# Altium PCB PCB4.PcbDoc
Units mil, origin at the board's own origin, x right, y up, seen from the top; angles counter-clockwise.
Board outline 2745 x 2970 mil, 4 copper layers (Top Layer, Layer 1, Layer 2, Bottom Layer), stack 23.756 mil thick; 50 components, 55 nets, 201 pads, 19 vias.
Unrouted connection lines stored in the file: 120.
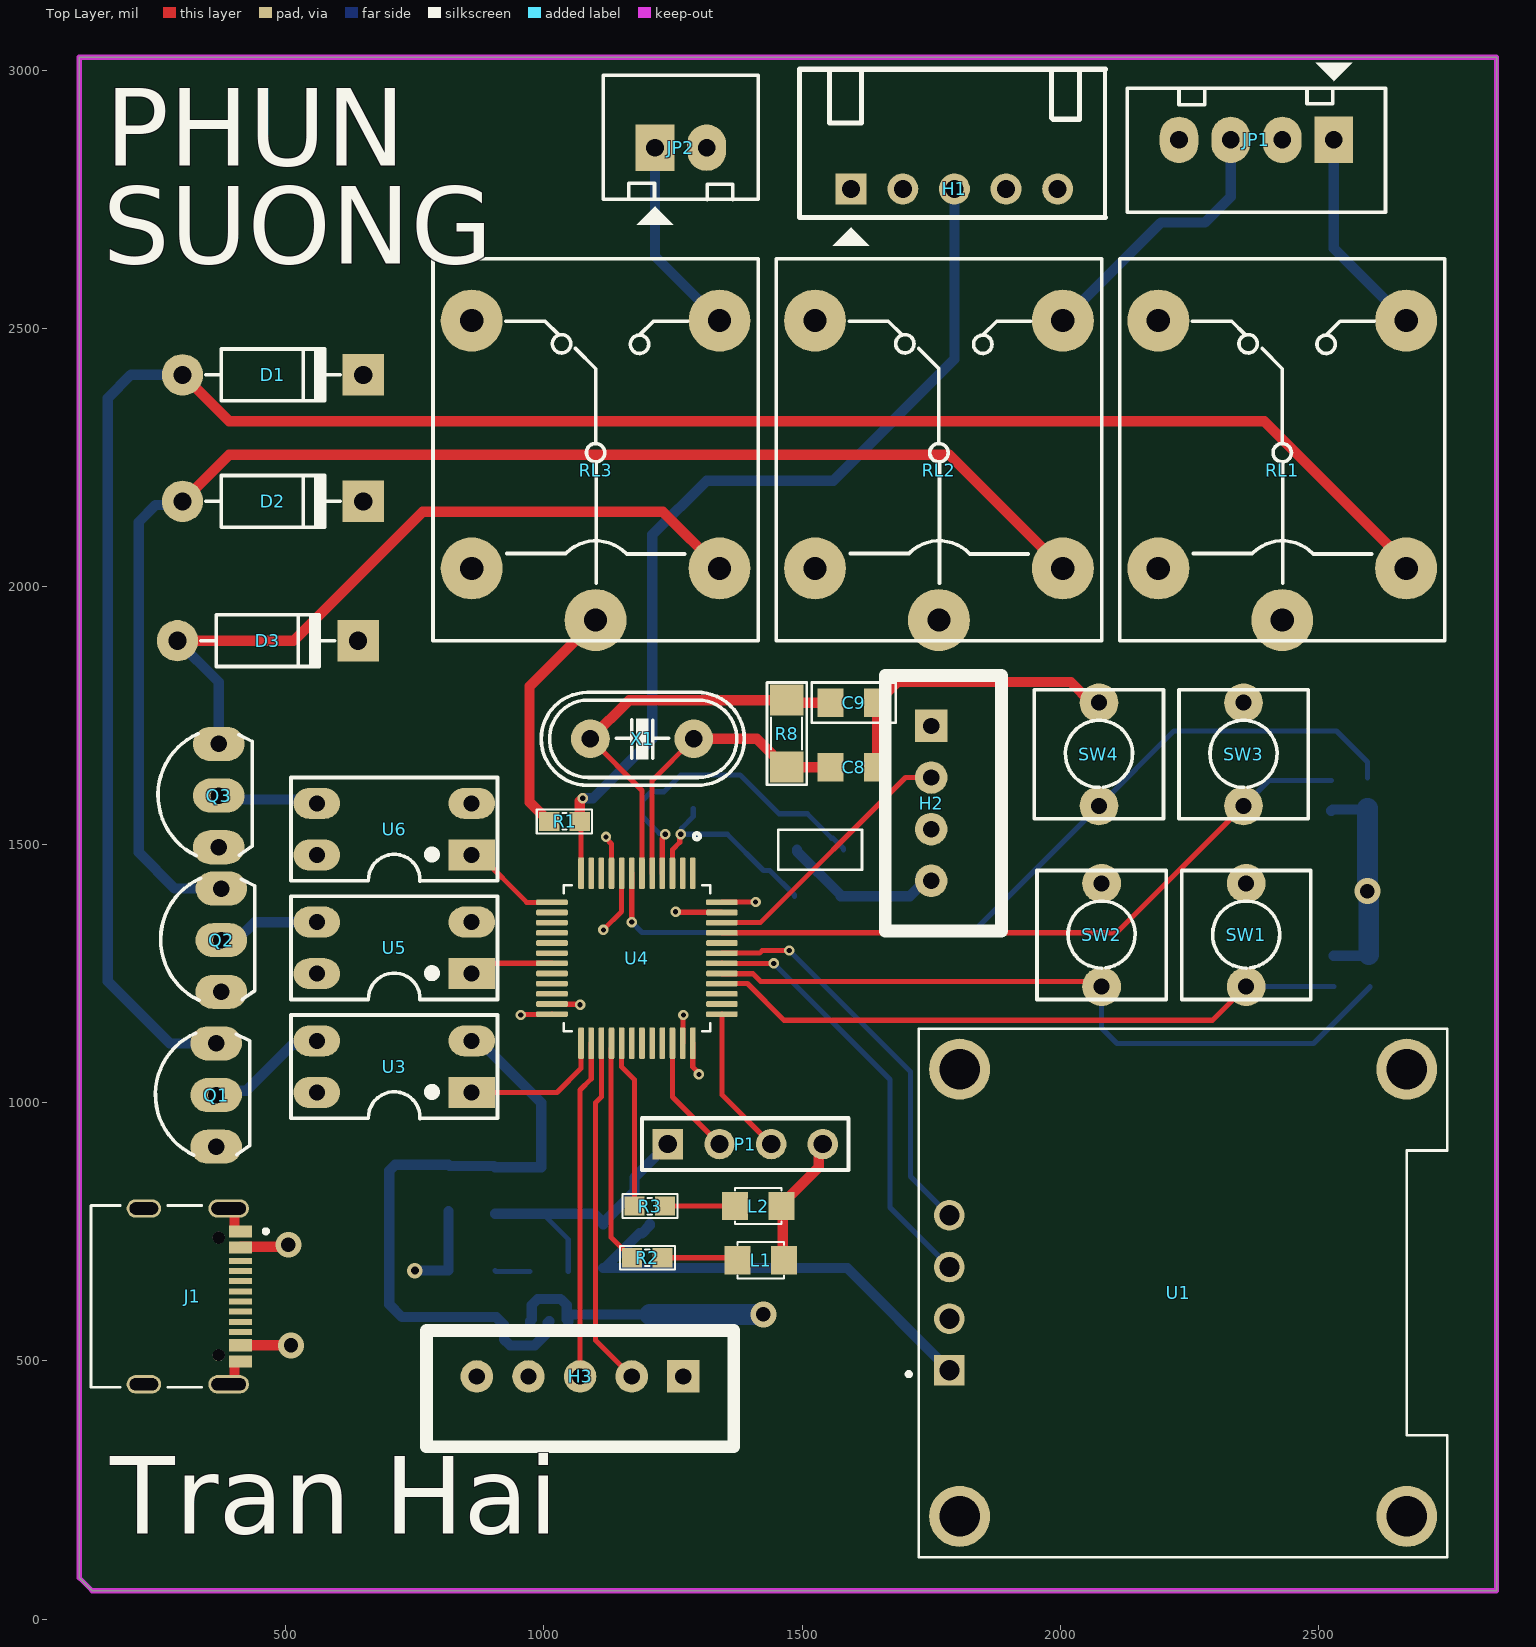
[diagram p0: Top Layer view]
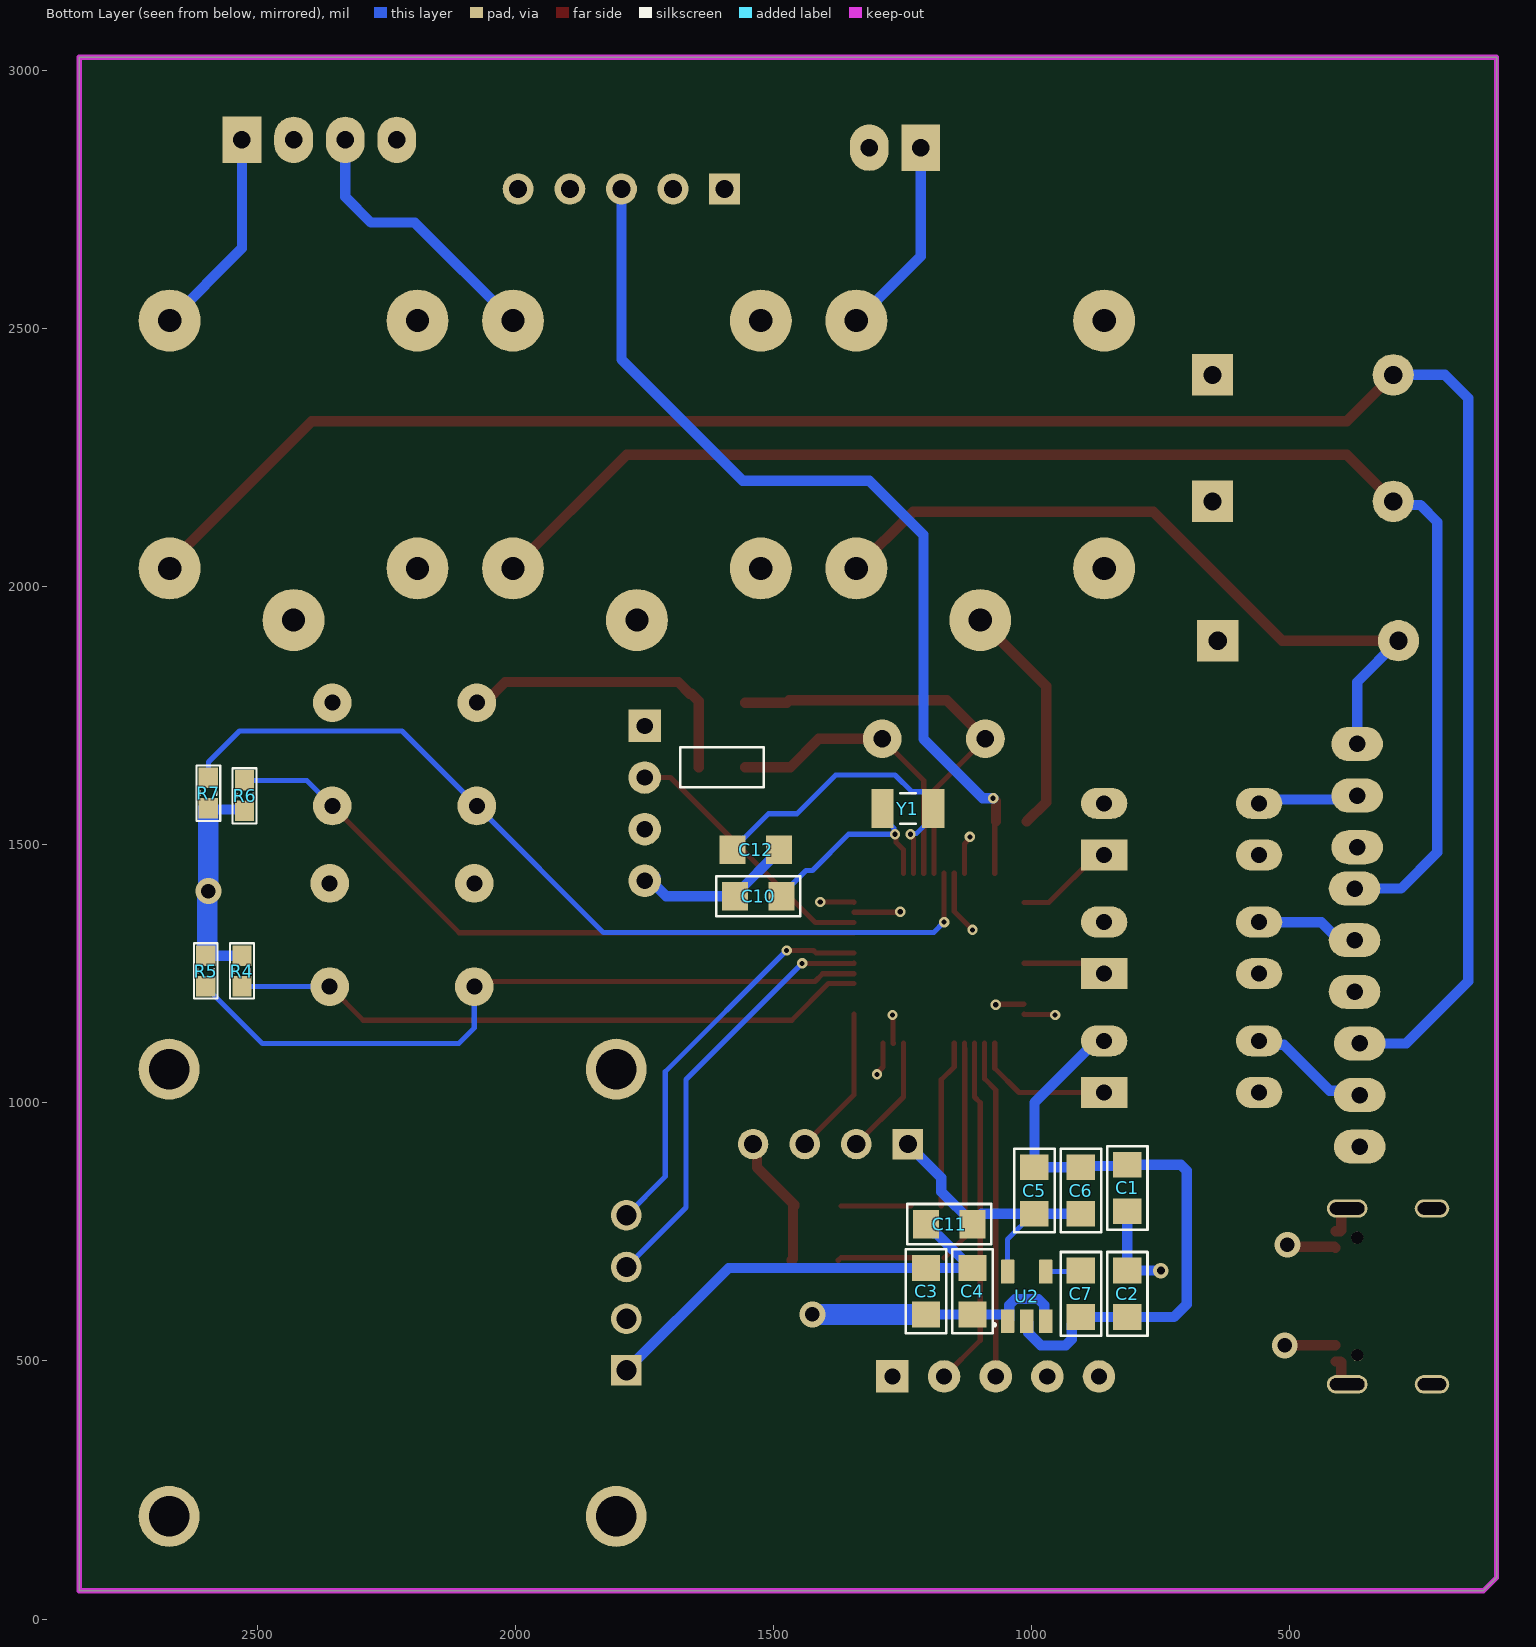
[diagram p1: Bottom Layer view, seen from below]
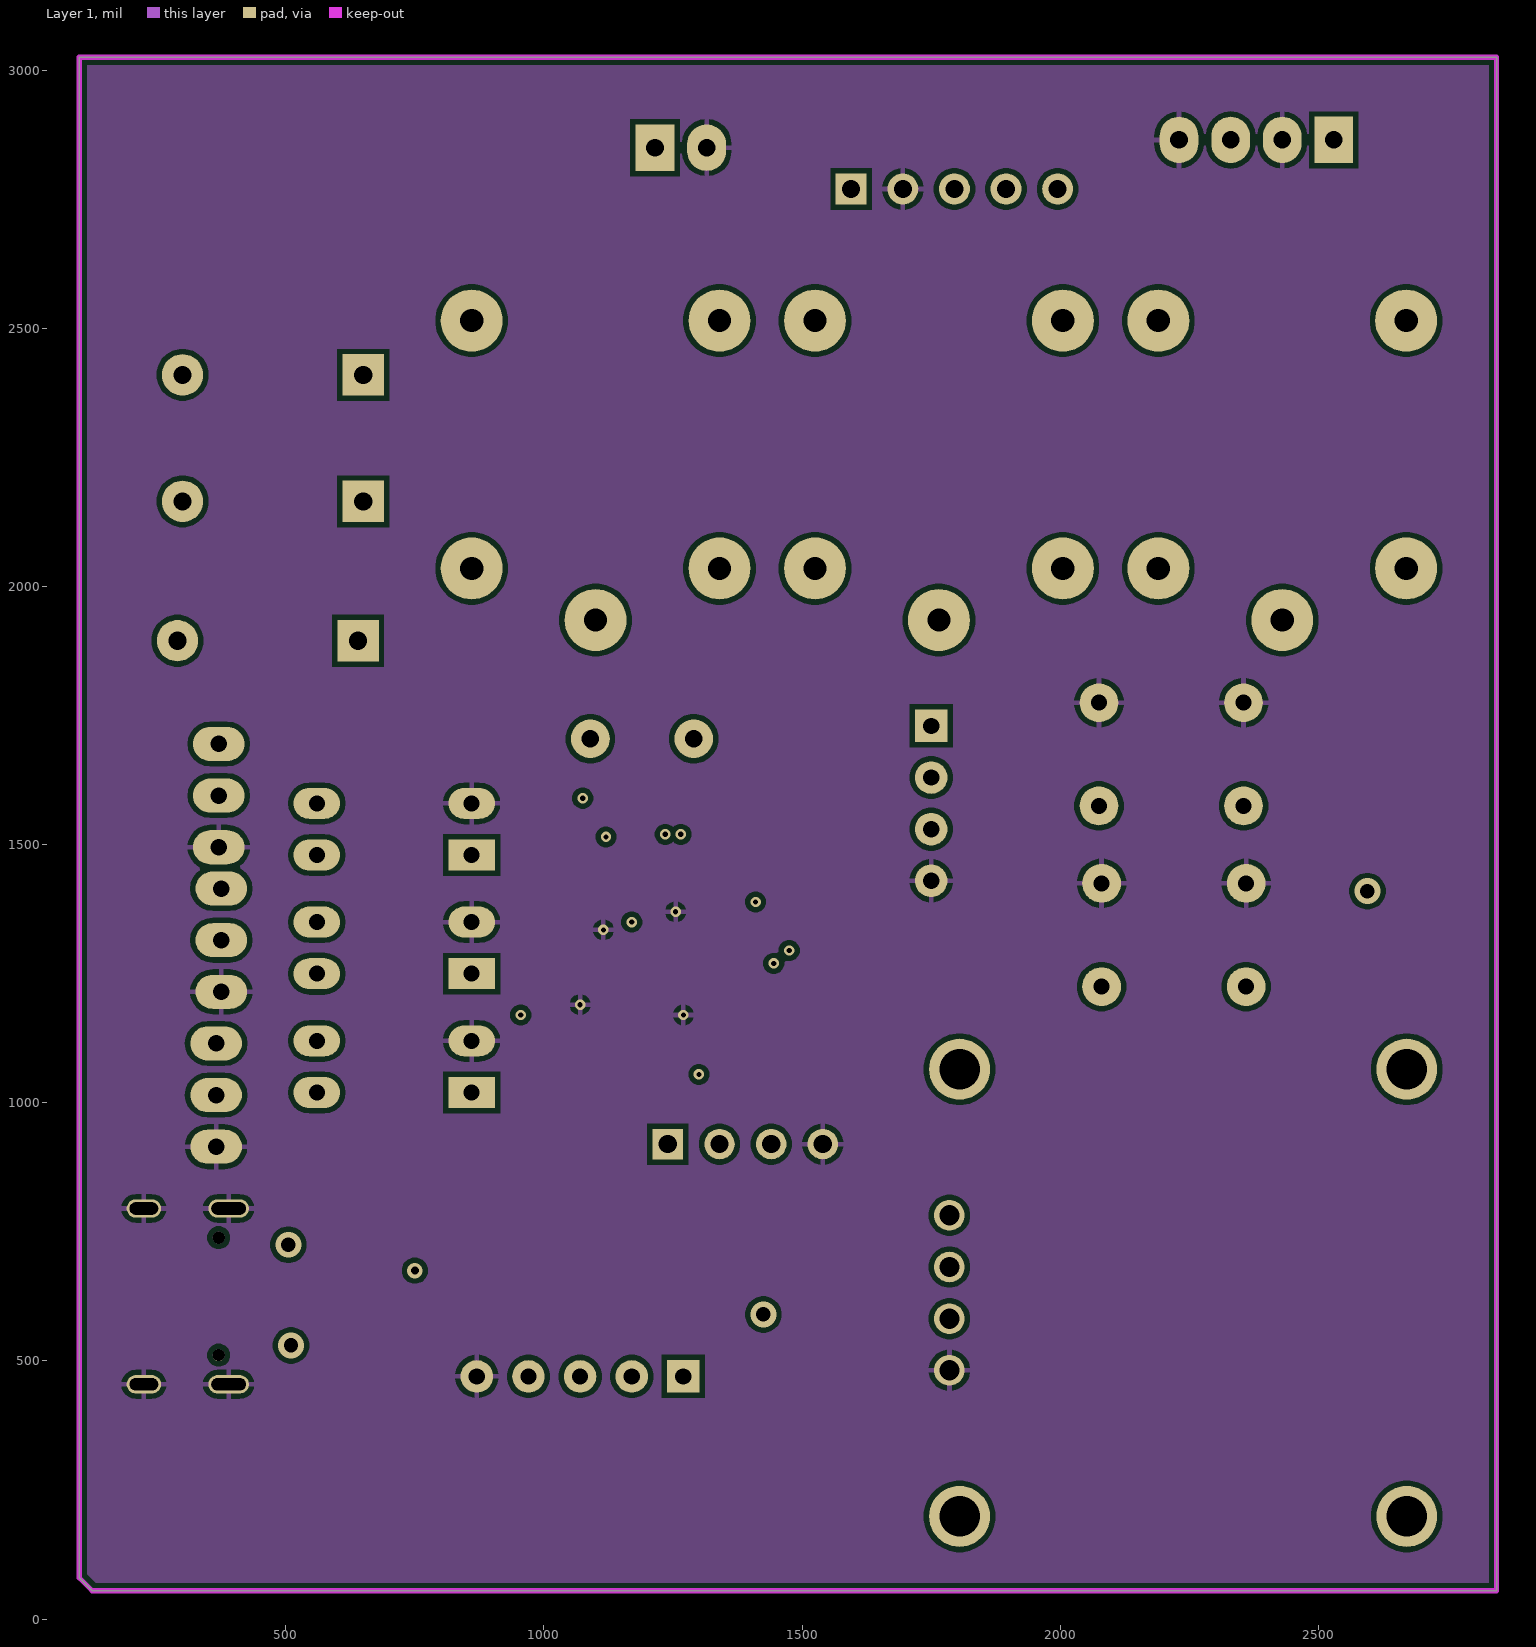
[diagram p2: Layer 1]
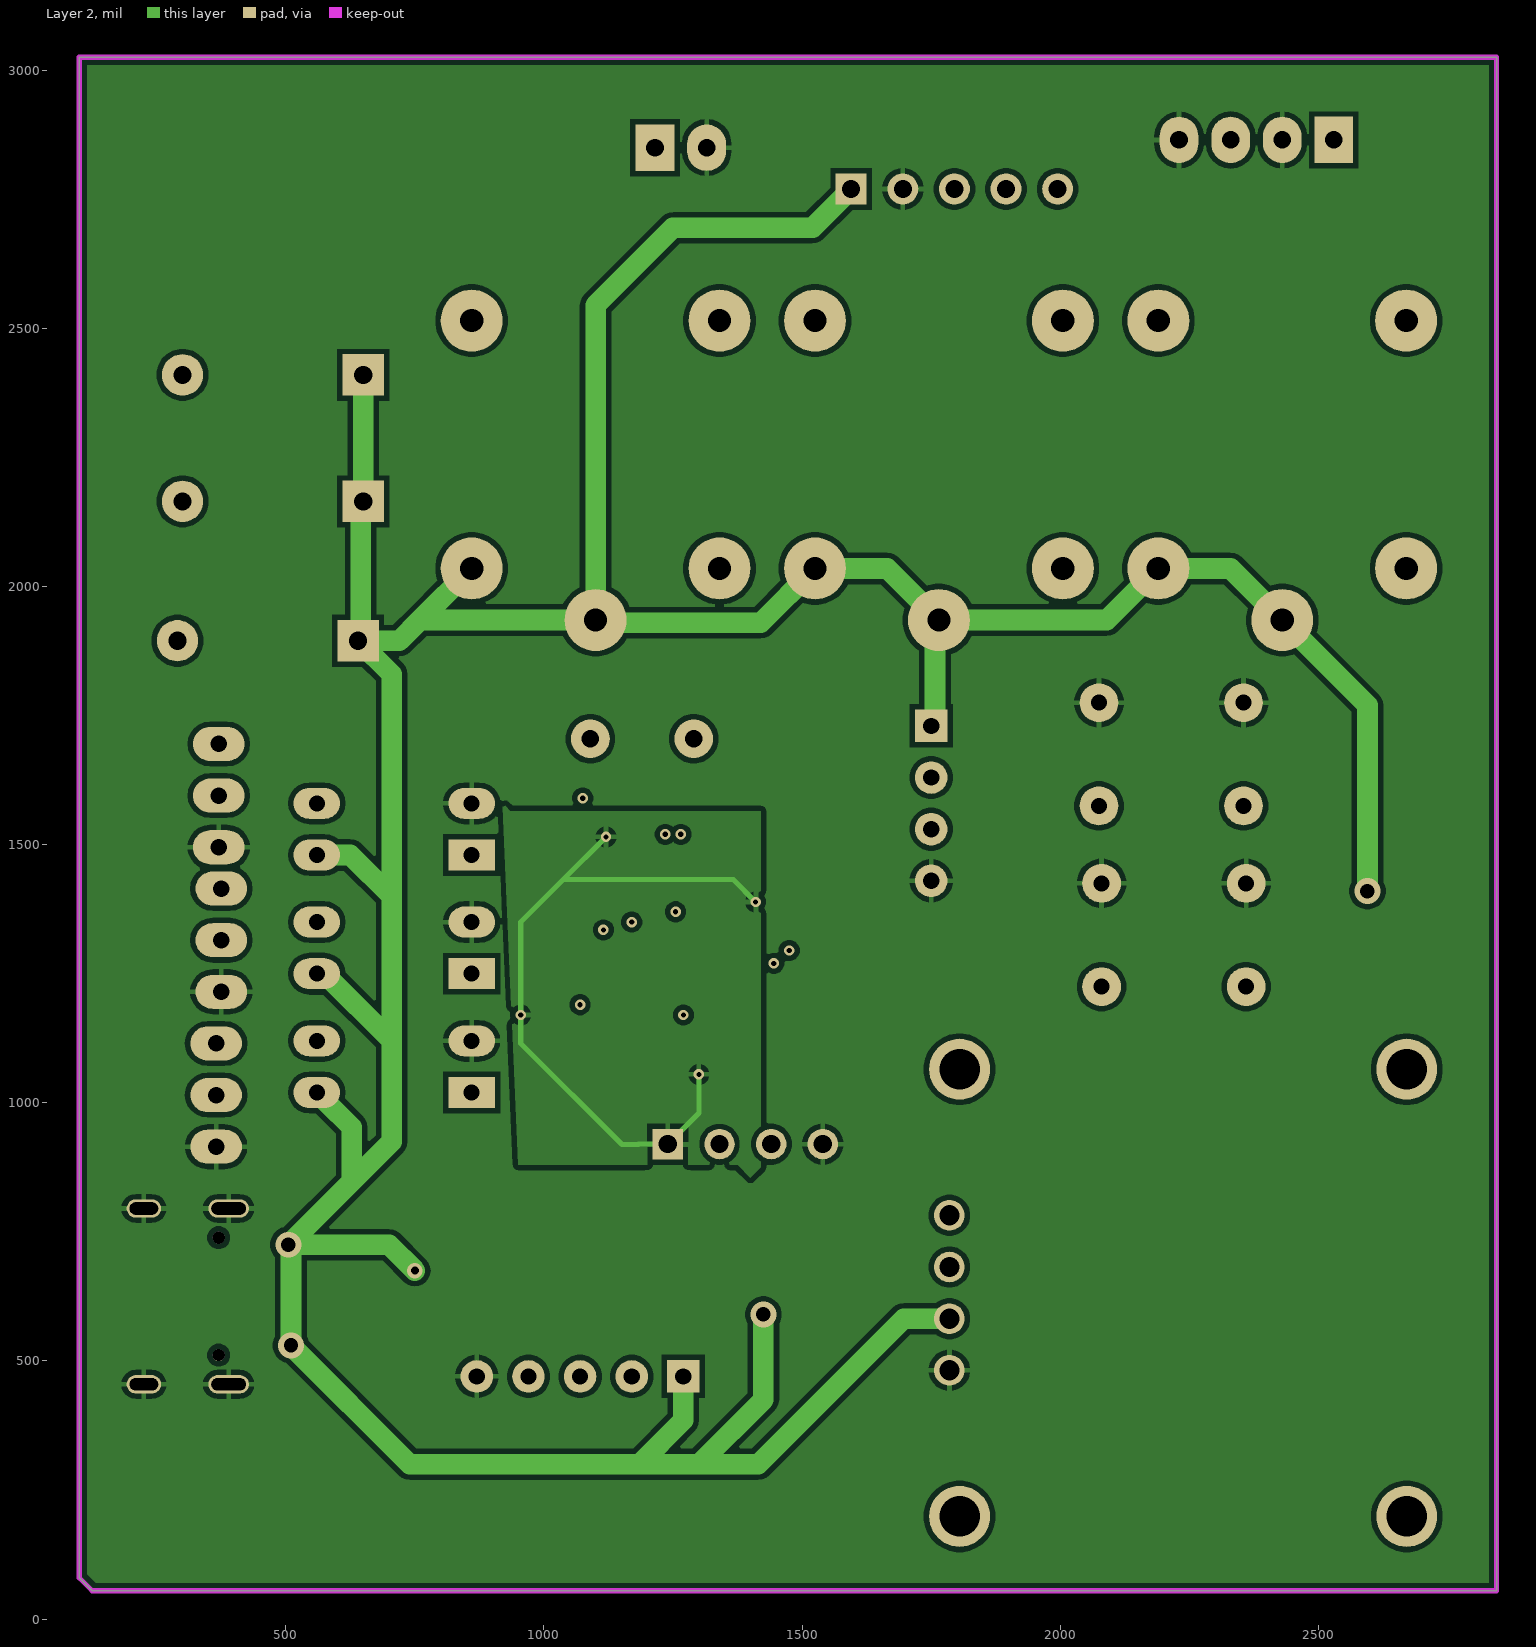
[diagram p3: Layer 2]
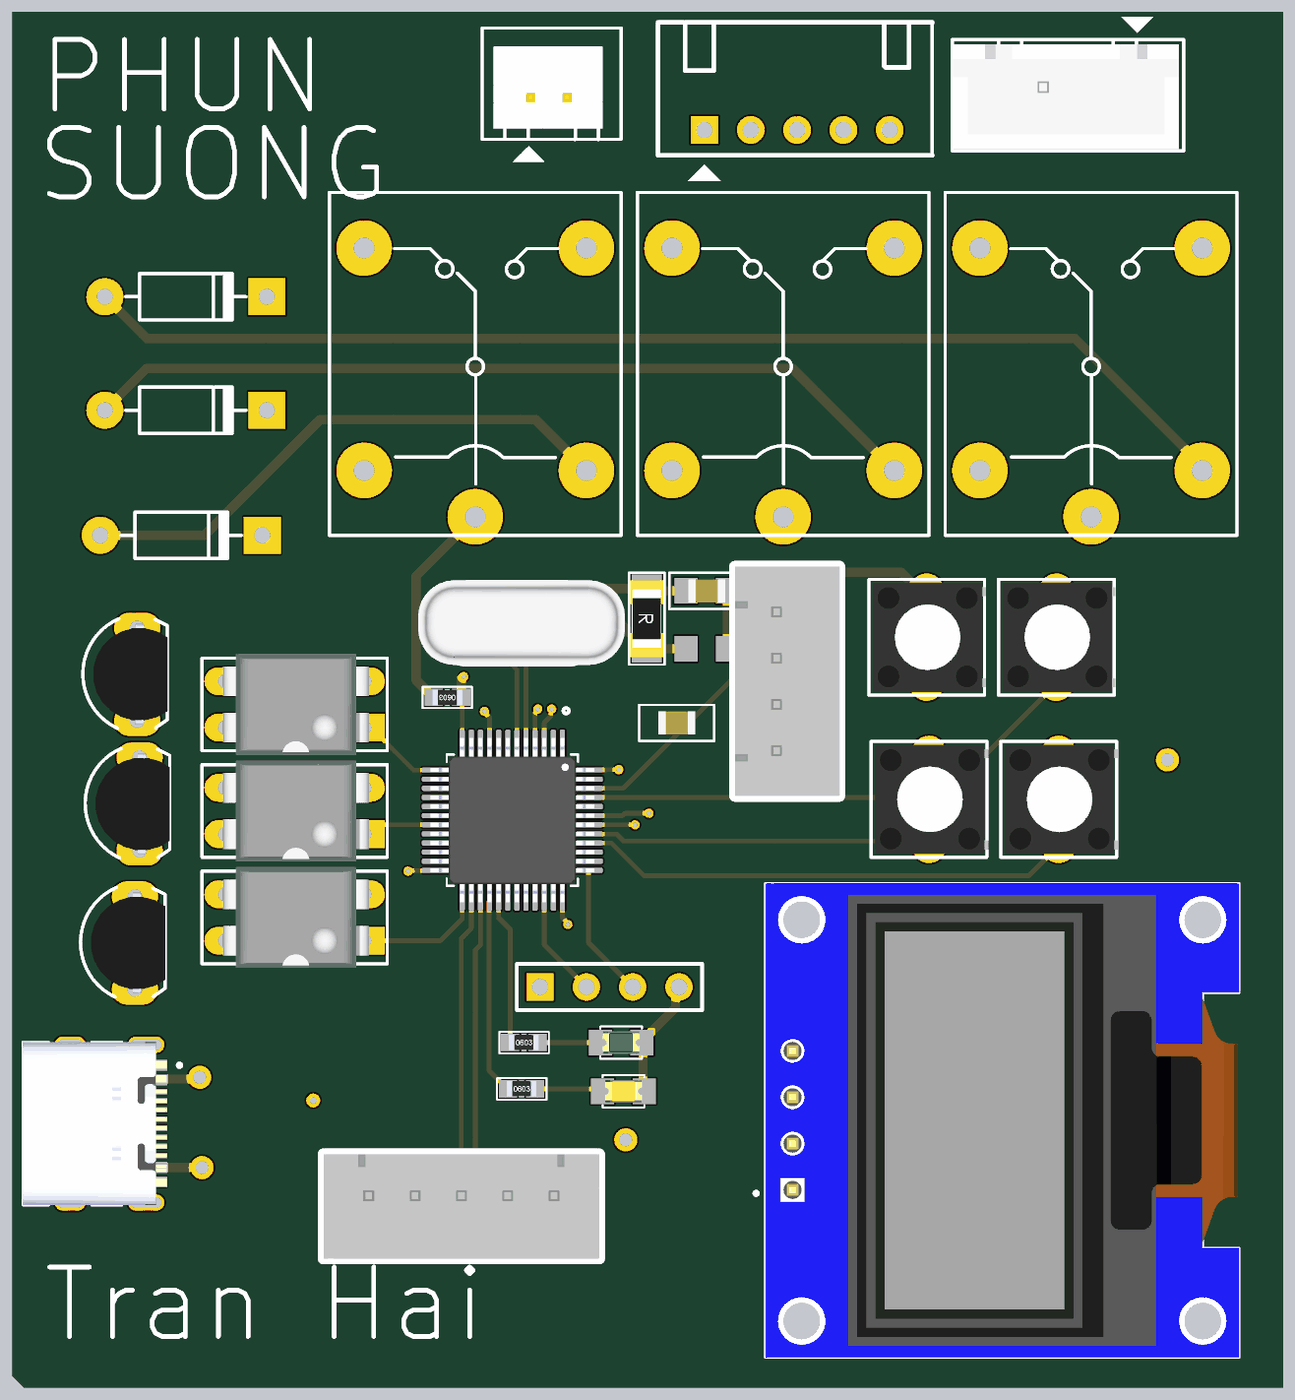
[diagram p4: 3D render of the assembled board from above, using the file's embedded part models]
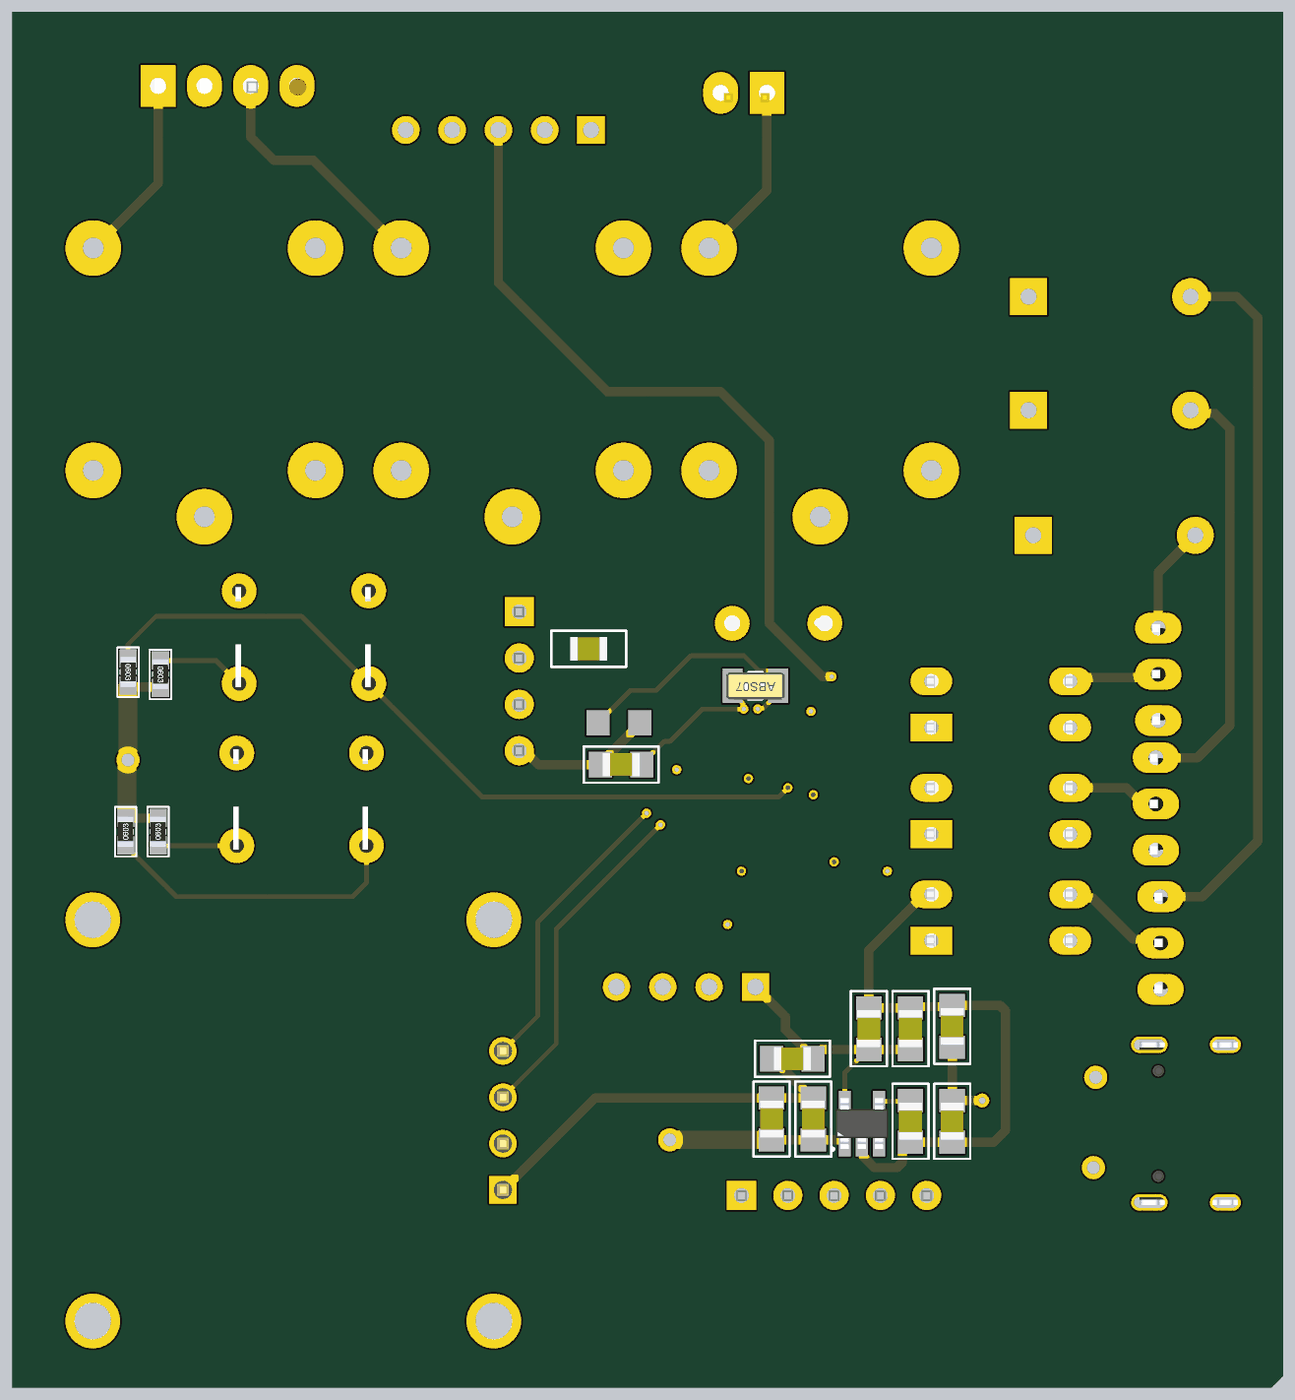
[diagram p5: 3D render of the assembled board from below, using the file's embedded part models]

## Layer stack, top to bottom
Top Solder: solder mask 0.4, Solder Resist, Dk 3.5
Top Layer: signal copper 1.4
Dielectric 2: prepreg 2.8, PP-006, Dk 4.29
Layer 1: signal copper 1.378
Dielectric 1: dielectric 12.6, FR-4, Dk 4.8
Layer 2: signal copper 1.378
Dielectric 5: prepreg 2.8, PP-006, Dk 4.29
Bottom Layer: signal copper 1.4
Bottom Solder: solder mask 0.4, Solder Resist, Dk 3.5

## Board outline
100,80 125,55 2845,55 2845,3025 100,3025

## Design rules (kind name [scope] priority, off if disabled: settings)
Clearance [All] p1: gap=10 ignorepadtopadclearanceinfootprint=FALSE except(0: Arc-Text Track-Text SMDPad-Text THPad-Text Via-Text Fill-Text Poly-Text Region-Text Text-Text; 5: Arc-Arc Arc-Track Arc-SMDPad Arc-THPad Track-Track Track-SMDPad Track-THPad SMDPad-SMDPad SMDPad-THPad SMDPad-Via SMDPad-Hole THPad-THPad THPad-Via THPad-Hole)
PolygonConnect [All] p1: connectstyle=Relief reliefconductorwidth=10 reliefentries=4 polygonreliefangle="90 Angle" airgapwidth=10
RoutingVias [All] p1: holewidth=15 width=30 viastyle="Through Hole" minholewidth=10 minwidth=20 maxholewidth=28 maxwidth=50
SolderMaskExpansion [All] p1: expansion=4 istentingtop=FALSE
Width [All] p1: maxlimit=40 minlimit=10 preferedwidth=20 minimp=50.000000 maximp=50.000000 favimp=50.000000
30 further rules are at their usual default settings.

## Components (designator, comment, footprint, x,y, rotation, side; value= is the part's Value field where it differs from the comment)
C1 "0805" C-0805 815,835 r270 bottom value=103
C2 "0805" C-0805 815,630 r90 bottom value=103
C3 "103" C-0805 1205,635 r270 bottom
C4 "103" C-0805 1115,635 r270 bottom
C5 "103" C-0805 995,830 r270 bottom
C6 "103" C-0805 905,830 r270 bottom
C7 "103" C-0805 905,630 r90 bottom
C8 "103" C-0805 1600,1650 r180 top
C9 "103" C-0805 1600,1775 r180 top
C10 "103" C-0805 1530,1400 r180 bottom
C11 "103" C-0805 1160,765 r180 bottom
C12 "103" C-0805 1535,1490 r0 bottom
D1 "1N4007" D1A 300,2410 r180 top
D2 "1N4007" D1A 300,2165 r180 top
D3 "1N4007" D1A 290,1895 r180 top
H1 "HLK LD2410c" "Header 5P DC 2.54" 1595,2770 r90 top
H2 "DHT22" XH2.54M-4 1750,1730 r270 top
H3 "HY SRF05" XH2.54M-5 1270,470 r180 top
J1 "TYPE-C-31-M-12" HRO_TYPE-C-31-M-12 225,625 r270 top
JP1 "PHUN SUONG" CON4 2530,2865 r180 top value="Connector 4"
JP2 "QUAT" CON2 1215,2850 r0 top value="Connector 2"
L1 "LED 0805" LED-0805-Yellow 1375,695 r0 top
L2 "LED 0805" LED-0805-Green 1370,800 r0 top
P1 "Header 4" HDR1X4 1240,920 r0 top
Q1 "NPN_EBC" QTO-92 365,1015 r90 top
Q2 "NPN_EBC" QTO-92 375,1315 r90 top
Q3 "NPN_EBC" QTO-92 370,1595 r90 top
R1 "1k" "TRO SMD 0603" 1040,1545 r180 top
R2 "220" "tro smd 0603" 1200,700 r0 top
R3 "220" "tro smd 0603" 1205,800 r0 top
R4 "1k" "TRO SMD 0603" 2530,1255 r90 bottom
R5 "1k" "TRO SMD 0603" 2600,1255 r90 bottom
R6 "1k" "TRO SMD 0603" 2525,1595 r270 bottom
R7 "1k" "TRO SMD 0603" 2595,1600 r270 bottom
R8 "1k" SM-1206 1470,1715 r270 top value="R1/4W - 1K"
RL1 "Relay 10A/12V" RL_SPDT_10A 2430,1935 r90 top value="Relay SPDT, 10A, 12V"
RL2 "Relay 10A/12V" RL_SPDT_10A 1765,1935 r90 top value="Relay SPDT, 10A, 12V"
RL3 "Relay 10A/12V" RL_SPDT_10A 1100,1935 r90 top value="Relay SPDT, 10A, 12V"
SW1 "SW" SW2 2360,1425 r270 top value="SW chip 2 pin"
SW2 "SW" SW2 2080,1425 r270 top value="SW chip 2 pin"
SW3 "SW" SW2 2355,1775 r270 top value="SW chip 2 pin"
SW4 "SW" SW2 2075,1775 r270 top value="SW chip 2 pin"
U1 "DM-OLED096-636" MODULE_DM-OLED096-636 2238.07,631.93 r90 top
U2 "RT9193-33GB" SOT94P279X129-5N 1010,625 r90 bottom
U3 "PC817" DIP4/W0.3 860,1020 r90 top
U4 "STM32F103C8T6" QFP50P900X900X160-48N 1180,1280 r270 top
U5 "PC817" DIP4/W0.3 860,1250 r90 top
U6 "PC817" DIP4/W0.3 860,1480 r90 top
X1 "4Mhz" XT2 1190,1705 r180 top
Y1 "ABS07-32.768KHZ-T" XTAL_ABS07-32.768KHZ-T 1240,1570 r0 bottom

## Footprints (in the part's own frame and the unit in brackets; to place one, negate y for a bottom-side part, rotate by r counter-clockwise, add the part's x,y. Pads: shape width x height; smd on the part's side, far side on the other; paste and mask are expansions set on the pad)
C-0805 [mil] "Compoment SMD 80x50mil"
  rect 50x55 smd: 1(-45,0) 2(45,0)
  silkscreen extent -81,-39 81,39, body extent -40,-25 40,25, height 24
CON2 [mil] "CON2"
  rect 75x90 hole 34: 1(0,0)
  oval 75x90 hole 34: 2(100,0)
  silkscreen extent -100,-150 200,140, body extent -76,-77 160,100, height 236
CON4 [mil] "CON4"
  rect 75x90 hole 34: 1(0,0)
  oval 75x90 hole 34: 2(100,0) 3(200,0) 4(300,0)
  silkscreen extent -100,-150 400,140, body extent -90,-90 398,136, height 276
D1A [mil] "Diode 1A, W 100mil, L 350mil"
  round 80 hole 35: 1(0,0)
  rect 80x80 hole 35: 2(-350,0)
  silkscreen extent -305,-50 -45,50, body extent -366,-42 16,41, height 100
DIP4/W0.3 [mil] "4 PIN, W 300mil, Pin to pin 100mil"
  rect 60x90 hole 31: 1(0,0)
  oval 60x90 hole 31: 2(100,0) 3(100,300) 4(0,300)
  silkscreen extent -50,-50 150,350, body extent -59,-10 159,305, height 170
HDR1X4 [mm] "Connector; Header; 4 Position"
  rect 1.5x1.5 hole 0.9: 1(0,0)
  round 1.5 hole 0.9: 2(2.54,0) 3(5.08,0) 4(7.62,0)
  silkscreen extent -1.27,-1.27 8.89,1.27, body extent -1.27,-1.27 8.89,1.27, height 7
"Header 5P DC 2.54" [mil]
  rect 60x60 hole 35: 1(0,0)
  round 60 hole 35: 2(0,-100) 3(0,-200) 4(0,-300) 5(0,-400)
  silkscreen extent -110,-492 232,100
HRO_TYPE-C-31-M-12 [mm]
  rect 0.6x1.14 smd mask+0.05: A1_B12(-3.2,4.75) A4_B9(-2.4,4.75) B1_A12(3.2,4.75) B4_A9(2.4,4.75)
  rect 0.3x1.14 smd mask+0.05: A5(-1.25,4.75) A6(-0.25,4.75) A7(0.25,4.75) A8(1.25,4.75) B5(1.75,4.75) B6(0.75,4.75) B7(-0.75,4.75) B8(-1.75,4.75)
  oval 0.9x2 hole 0.6 slot 1.7 at 90 deg: S1(-4.325,4.17) S2(4.325,4.17)
  oval 0.9x1.7 hole 0.6 slot 1.4 at 90 deg: S3(-4.325,0) S4(4.325,0)
  round 0.6 hole 0.6 unplated: ""(-2.89,3.68) ""(2.89,3.68)
  silkscreen extent -4.47,-2.6 4.47,6.1, body extent -4.47,-2.6 4.47,5.31, height 3.31
LED-0805-Green [mil]
  rect 50x55 smd: 1(0,0) 2(90,0)
  silkscreen extent 0,-35 90,35, body extent 5,-25 85,25, height 43
LED-0805-Yellow [mil]
  rect 50x55 smd: 1(0,0) 2(90,0)
  silkscreen extent 0,-35 90,35, body extent 5,-25 85,25, height 43
MODULE_DM-OLED096-636 [mm]
  rect 1.508x1.508 / inner round 1.508 / far side rect 1.508x1.508 hole 1: 1(-3.81,11.5)
  round 1.508 hole 1: 2(-1.27,11.5) 3(1.27,11.5) 4(3.81,11.5)
  round 3 hole 2: S1(-11,11) S2(11,11) S3(11,-11) S4(-11,-11)
  silkscreen extent -13,-13 13,13.6, body extent -13,-13 13,13, height 5.66
QFP50P900X900X160-48N [mm]
  rrect50% 1.56x0.28 smd: 1(-4.18,2.75) 2(-4.18,2.25) 3(-4.18,1.75) 4(-4.18,1.25) 5(-4.18,0.75) 6(-4.18,0.25) 7(-4.18,-0.25) 8(-4.18,-0.75) 9(-4.18,-1.25) 10(-4.18,-1.75) 11(-4.18,-2.25) 12(-4.18,-2.75) 25(4.18,-2.75) 26(4.18,-2.25) 27(4.18,-1.75) 28(4.18,-1.25) 29(4.18,-0.75) 30(4.18,-0.25) 31(4.18,0.25) 32(4.18,0.75) 33(4.18,1.25) 34(4.18,1.75) 35(4.18,2.25) 36(4.18,2.75)
  rrect50% 0.28x1.56 smd: 13(-2.75,-4.18) 14(-2.25,-4.18) 15(-1.75,-4.18) 16(-1.25,-4.18) 17(-0.75,-4.18) 18(-0.25,-4.18) 19(0.25,-4.18) 20(0.75,-4.18) 21(1.25,-4.18) 22(1.75,-4.18) 23(2.25,-4.18) 24(2.75,-4.18) 37(2.75,4.18) 38(2.25,4.18) 39(1.75,4.18) 40(1.25,4.18) 41(0.75,4.18) 42(0.25,4.18) 43(-0.25,4.18) 44(-0.75,4.18) 45(-1.25,4.18) 46(-1.75,4.18) 47(-2.25,4.18) 48(-2.75,4.18)
  silkscreen extent -6.15,-3.6 3.6,3.6, body extent -4.5,-4.5 4.5,4.5, height 1.6
QTO-92 [mil] "TO-92"
  oval 66x100 hole 32: 1(-100,0) 2(0,0) 3(100,0)
  silkscreen extent -117,-65 120,118, body extent -109,-66 109,95, height 385
RL_SPDT_10A [mil] "Relay SPDT, 5 pin, 10A,W 650mil, L 800mil, H 800mil"
  round 120 hole 45: 1(0,0) 2(580,240) 3(580,-240) 4(100,-240) 5(100,240)
  silkscreen extent -40,-315 700,315
SM-1206 [mil] "Compoment SMD 120x60mil"
  rect 60x65 smd: 1(-65,0) 2(65,0)
  silkscreen extent -99,-38 99,39, body extent -83,-35 83,36, height 25
SOT94P279X129-5N [mm]
  rrect12% 1.17x0.67 smd: 1(-1.22,0.94) 2(-1.22,0) 3(-1.22,-0.94) 4(1.22,-0.94) 5(1.22,0.94)
  silkscreen extent -1.47,1.53 -1.33,1.67, body extent -1.4,-1.45 1.4,1.45, height 1.3
SW2 [mil] "SW button 2pin, 250x 250 mil"
  round 75 hole 31: 1(0,0) 2(200,0)
  silkscreen extent -25,-125 225,125, body extent -18,-116 218,128, height 197
"TRO SMD 0603" [mm] "Chip Capacitor, 2-Leads, Body 1,60x0,80mm, IPC Medium Density"
  rect 1x0.95 smd mask+0.076: 1(-0.75,0) 2(0.75,0)
  silkscreen extent -1.35,-0.58 1.37,0.58, body extent -0.82,-0.42 0.82,0.43, height 0.44
"tro smd 0603" [mm] "Chip Capacitor, 2-Leads, Body 1,60x0,80mm, IPC Medium Density"
  rect 1x0.95 smd mask+0.076: 1(-0.75,0) 2(0.75,0)
  silkscreen extent -1.35,-0.58 1.37,0.58, body extent -0.82,-0.42 0.82,0.43, height 0.44
XH2.54M-4 [mm]
  rect 1.6x1.6 hole 0.8: 1(0,0)
  round 1.6 hole 0.8: 2(2.54,0) 3(5.08,0) 4(7.62,0)
  silkscreen extent -2.48,-2.26 10.1,3.46, body extent -2.48,-2.26 10.1,3.48, height 6.91
XH2.54M-5 [mm]
  rect 1.6x1.6 hole 0.8: 1(0,0)
  round 1.6 hole 0.8: 2(2.54,0) 3(5.08,0) 4(7.62,0) 5(10.16,0)
  silkscreen extent -2.48,-2.26 12.64,3.46, body extent -2.48,-2.26 12.64,3.48, height 6.91
XT2 [mil] "Footpin for Crystal 2 pin"
  round 75 hole 34: 1(-100,0) 2(100,0)
  silkscreen extent -198,-90 195,90, body extent -233,-93 213,90, height 138
XTAL_ABS07-32.768KHZ-T [mm]
  rect 1.1x1.9 smd: 1(-1.25,0) 2(1.25,0)
  silkscreen extent -0.38,-0.75 0.38,0.75, body extent -1.6,-0.75 1.6,0.75, height 0.89

## Part data
C1 C2 C3 C4 C5 C6 C7 C8 C9 C10 C11 C12: library part C, "Cap SMD"
D1 D2 D3: library part D1A, "Diode 1A"
H1: library part "Header 5P 2.54 Duc Cong", "Cắm", Chung_Loai=Cắm, Don_Vi=Con, Ma_Hang=MH001308, Ten_Linh_Kien="Header 5P XH2.54-5P Đực Cong"
H2: library part "Header 4P 2.54 Duc Thang", "Cắm", Chung_Loai=Cắm, Don_Vi=Con, Ma_Hang=MH001285, Ten_Linh_Kien="Header 4P XH2.54-4P Đực Thẳng"
H3: library part "Header 5P 2.54 Duc Thang", "Cắm", Chung_Loai=Cắm, Don_Vi=Con, Ma_Hang=MH001298, Ten_Linh_Kien="Header 5P XH2.54-5P Đực Thẳng"
J1: "USB Connectors 24 Receptacle 1 8.94*7.3mm RoHS", Package=Package, Availability="Not in stock", Check_prices=https://www.snapeda.com/parts/TYPE-C-31-M-12/HRO+Electronics+Co.%252C+Ltd./view-part/?ref=eda, MF="HRO Electronics Co., Ltd.", MP=TYPE-C-31-M-12, Price=None, SnapEDA_Link=https://www.snapeda.com/parts/TYPE-C-31-M-12/HRO+Electronics+Co.%252C+Ltd./view-part/?ref=snap
JP1: library part Con4, "Connector 4"
JP2: library part Con2, "Connector 2"
L1: library part "LED 0805 Vang", "Dán", Chung_Loai=Dán, Don_Vi=Con, Ma_Hang=MH002329, Ten_Linh_Kien="LED 0805 Màu Vàng ( Yellow)"
L2: library part "LED 0805 Xanh La", "Dán", Chung_Loai=Dán, Don_Vi=Con, Ma_Hang=MH002326, Ten_Linh_Kien="LED 0805 Màu Xanh Lá (Green)"
P1: "Header, 4-Pin", LatestRevisionDate=17-Jul-2002, LatestRevisionNote="Re-released for DXP Platform.", Publisher="Altium Limited"
Q1 Q2 Q3: "NPN Transistor"
R1 R4 R5 R6 R7: library part Res_0603
R2 R3: library part "Tro 0603 1% 0R", "Dán", Chung_Loai=Dán, Don_Vi=Con, Ma_Hang=MH005792, So_Chan=2, Ten_Linh_Kien="Trở 0603 1% 0R"
R8: library part R, "Resistor 1/4W"
RL1 RL2 RL3: library part "Relay 1", "Relay SPDT,10A - 12VDC 5 Pin"
SW1 SW2 SW3 SW4: library part SW2, "Switch button 2 pin"
U1: "0.96â€ 128 X 64 MONOCHROME GRAPHIC OLED DISPLAY MODULE - I2C", Package=Package, Check_prices=https://www.snapeda.com/parts/DM-OLED096-636/Display+Module/view-part/?ref=eda, MF="Display Module", MP=DM-OLED096-636, SnapEDA_Link=https://www.snapeda.com/parts/DM-OLED096-636/Display+Module/view-part/?ref=snap
U2: "Linear Voltage Regulator IC Positive Fixed 1 Output 300mA TSOT-23-5", Package="SOT-23-5 Richtek", Check_prices=https://www.snapeda.com/parts/RT9193-33GB/Richtek+USA+Inc./view-part/?ref=eda, Digi-Key_Part_Number=1028-1014-2-ND, MF="Richtek USA", MP=RT9193-33GB, Purchase-URL=https://pricing.snapeda.com/search/part/RT9193-33GB/?ref=eda, SnapEDA_Link=https://www.snapeda.com/parts/RT9193-33GB/Richtek+USA+Inc./view-part/?ref=snap
U3 U5 U6: "Single Opto"
U4: "ARM® Cortex®-M3 STM32F1 Microcontroller IC 32-Bit 72MHz 64KB (64K x 8) FLASH 48-LQFP (7x7)", Package="LQFP-48 STMicroelectronics", Check_prices=https://www.snapeda.com/parts/STM32F103C8T6/STMicroelectronics/view-part/?ref=eda, MF=STMicroelectronics, MP=STM32F103C8T6, SnapEDA_Link=https://www.snapeda.com/parts/STM32F103C8T6/STMicroelectronics/view-part/?ref=snap
X1: library part XT2, "Crystal For all Crystal 2pin."
Y1: "32.768 kHz Â±20ppm Crystal 12.5pF 70 kOhms 2-SMD, No Lead", Package="SMD-2 Abracon LLC", Availability="In Stock", Check_prices=https://www.snapeda.com/parts/ABS07-32.768KHZ-T/Abracon+LLC/view-part/?ref=eda, MF=Abracon, MP=ABS07-32.768KHZ-T, Price=None, Purchase-URL=https://pricing.snapeda.com/search/part/ABS07-32.768KHZ-T/?ref=eda, SnapEDA_Link=https://www.snapeda.com/parts/ABS07-32.768KHZ-T/Abracon+LLC/view-part/?ref=snap

## Via types
v1: diameter 20, hole 10, Top Layer to Bottom Layer, 14 vias
v2: diameter 50, hole 28, Top Layer to Bottom Layer, 4 vias
v3: diameter 30, hole 15, Top Layer to Bottom Layer, 1 vias

## Nets (pads, with @x,y where several pads share a name; then routed paths per layer and width w, separated by ;. In a path a pad name is that pad's centre, name@x,y a point inside that pad or via, vN(x,y) a via of type N, cw(c..) or ccw(c..) an arc to the next point about the centre after c; other vN are vias at no path point)
3.3V: C5.2 C6.2 C11.2 P1.1 U2.5 U4.9 U4.24 U4.36 U4.48 | length 2208.7
  Top Layer w10: v1(955,1170) 956.22,1171.22 1014.92,1171.22 U4.24 ; v1(1120,1515) 1120,1512.29 1130.79,1501.51 U4.9 ; U4.36 1288.27,1069.44 1300,1057.71 v1(1300,1055) ; U4.48 1345.08,1388.78 1384.72,1388.78 1384.98,1389.04 v1(1409.98,1389.04)
  Layer 2 w10: v1(1120,1515) 1037.5,1432.5 ; v1(1300,1055) 1300,980 P1.1 1183.59,920 1182.74,919.14 1150.86,919.14 955,1115 v1(955,1170) 955,1350 1037.5,1432.5 ; v1(1409.98,1389.04) 1366.52,1432.5 1037.5,1432.5
  Bottom Layer w10: C5.2 997.5,785 1047.01,735.49 U2.5
  Bottom Layer w20: C6.2 C5.2 ; C5.2@997.5,785 1097.5,785 C11.2@1115,767.5 ; C11.2 C11.2@1115,767.5 ; P1.1 1175.24,855.24 1175.24,827.74 C11.2@1115,767.5
5V: C1.2 C2.2 C3.2 C4.2 D1.2 D2.2 D3.2 H1.1 H2.1 H3.1 J1.A4_B9 J1.B4_A9 R1.2 R4.2 R5.2 R6.2 R7.2 RL1.1 RL1.5 RL2.1 RL2.5 RL3.1 RL3.5 U1.2 U2.1 U2.3 U3.4 U5.4 U6.4 | length 10825.5
  Top Layer w20: J1.B4_A9 412.26,530.26 509.74,530.26 v2(510,530) ; J1.A4_B9 413.82,721.3 501.3,721.3 v2(505,725) ; R1.2 1009.49,1545 972.12,1582.36 972.12,1807.12 RL3.1
  Layer 2 w20: U3.4 U3.4@575,1005
  Layer 2 w40: U3.4 569.59,1020 578.83,1010.76 578.83,1001.17 627.5,952.5 627.5,847.5 ; U5.4 575,1250 705,1120 ; U6.4 625,1480 705,1400 ; D1.2 D2.2 645,2160 645,1900 D3.2 ; v3(750,675) 700,725 v2(505,725) ; RL3.5 760,1935 ; H3.1 1270,385 1185,300 ; v2(1425,590) 1425,425 1300,300 ; H1.1 1520,2695 1250,2695 1100,2545 RL3.1 ; H2.1 1757.5,1737.5 1757.5,1927.5 RL2.1 ; U1.2 1696.93,581.93 1415,300 1300,300 ; v2(2595,1410) 2595,1770 RL1.1 2429.68,1935 2329.68,2035 RL1.5 2090,1935 RL2.1 ; v2(505,725) 627.5,847.5 ; v2(505,725) 505,722.29 510,717.29 v2(510,530) 740,300 1185,300 ; 627.5,847.5 705,925 705,1120 ; D3.2 720,1895 760,1935 ; D3.2 705,1830 705,1400 ; 705,1120 705,1400 ; 760,1935 RL3.1 ; RL3.1 1105,1930 1420,1930 RL2.5 1664.68,2035 1764.68,1935 RL2.1 ; 1185,300 1300,300
  Bottom Layer w20: v3(750,675) C2.2 C1.2 ; U2.3@972.99,567.13 U2.3 976.18,580.16 976.18,608.28 987.9,620 1032.1,620 1043.82,608.28 1043.82,580.16 U2.1 1047.01,586.81 1050.2,590 C4.2 C3.2 ; R6.2 2527.5,1567.97 2592.5,1567.97 R7.2 ; R4.2 R5.2 R5.2@2597.5,1287.03 ; v2(2595,1410) v2@2597.5,1407.5
  Bottom Layer w40: C3.2 v2(1425,590) ; v2(2595,1410) R7.2 ; R5.2@2597.5,1287.03 v2@2597.5,1407.5
BOOT0: U4.44
BOOT1: U4.20
fan: JP2.1 RL3.3 | length 386.8
  Bottom Layer w20: JP2.1 1215,2640 RL3.3
GND: C1.1 C2.1 C3.1 C4.1 C5.1 C6.1 C7.1 C8.1 C9.1 C10.1 C11.1 C12.1 H1.2 H2.4 H3.5 J1.A1_B12 J1.B1_A12 J1.S1 J1.S2 J1.S3 J1.S4 JP1.2 JP1.4 JP2.2 L1.2 L2.2 P1.4 Q1.1 Q2.1 Q3.1 SW1.1 SW2.1 SW3.1 SW4.1 U1.1 U2.2 U3.2 U4.8 U4.23 U4.35 U4.47 U5.2 U6.2 | length 3772.1
  Top Layer w10: U4.23 1015.94,1190.91 1069.09,1190.91 v1(1070,1190) ; v1(1115,1335) 1150.47,1370.47 U4.8 ; v1(1255,1370) 1255.91,1369.09 1344.06,1369.09 U4.47 ; U4.35 1269.09,1115.94 1269.09,1169.09 v1(1270,1170)
  Top Layer w20: J1.S2 393.46,454.72 400.59,461.85 400.59,497.2 402.4,499.02 J1.B1_A12 ; J1.S1 393.46,795.28 400.59,788.15 400.59,752.8 402.4,750.98 J1.A1_B12 ; L1.2 1462.5,697.5 1462.5,797.5 L2.2 1460,802.5 1532.53,875.03 1532.53,912.53 P1.4 ; C8.1 C9.1 1645,1777.5 1660,1792.5 1662.5,1792.5 1685,1815 2020.12,1815 2060.12,1775 SW4.1
  Bottom Layer w20: U3.2 875,1120 995,1000 C5.1 C6.1 902.5,877.5 817.5,877.5 C1.1 711.72,880 700,868.28 700,610 725,585 C2.1 C7.1 907.5,585 922.5,570 922.5,541.72 934.22,530 982.53,530 1006.81,554.28 1006.81,573.78 U2.2 ; C4.1 C4.1@1117.5,680 ; C11.1 1205,762.5 1190,747.5 1185,747.5 C4.1@1117.5,680 ; C12.1 1490,1487.5 1575,1402.5 C10.1 1708.37,1400 1738.37,1430 H2.4 1741.77,1438.23 H2.4@1729.27,1438.23 ; U1.1 1587.24,680 C3.1 C4.1@1117.5,680
NetC7_2: C7.2 U2.4 | length 68.8
  Bottom Layer w10: C7.2 906.97,673.03 U2.4
NetD1_1: D1.1 Q1.3 RL1.4 | length 4084.5
  Top Layer w20: D1.1 390,2320 2395,2320 2670,2045 RL1.4
  Bottom Layer w20: D1.1 200,2410 155,2365 155,1235 275,1115 Q1.3
NetD2_1: D2.1 Q2.3 RL2.4 | length 2764
  Top Layer w20: D2.1 390,2255 1785,2255 RL2.4
  Bottom Layer w20: D2.1 293,2158 248,2158 215,2125 215,1485 285,1415 Q2.3
NetD3_1: D3.1 Q3.3 RL3.4 | length 1432.3
  Top Layer w20: D3.1 515,1895 765,2145 1230,2145 RL3.4
  Bottom Layer w20: D3.1 370,1815 Q3.3
NetL1_1: L1.1 R2.2 | length 147.5
  Top Layer w10: R2.2 1370,700 L1.1
NetL2_1: L2.1 R3.2 | length 135.5
  Top Layer w10: R3.2 L2.1
NetQ1_2: Q1.2 U3.3 | length 238.5
  Bottom Layer w20: Q1.2 373.05,1023.05 423.05,1023.05 512.35,1112.35 552.35,1112.35 U3.3
NetQ2_2: Q2.2 U5.3 | length 199.5
  Bottom Layer w20: Q2.2 404.45,1315 439.45,1350 U5.3
NetQ3_2: Q3.2 U6.3 | length 196.2
  Bottom Layer w20: Q3.2 377.5,1587.5 552.5,1587.5 U6.3
PA0: U4.10
PA1: U4.11
PA2: H1.3 R1.1 U4.12 | length 1782.1
  Top Layer w10: R1.1 1071.73,1542.8 U4.12
  Top Layer w20: R1.1 1069.53,1584.53 v1(1075,1590)
  Bottom Layer w20: v1(1075,1590) 1095,1590 1210,1705 1210,2100 1315,2205 1560,2205 1795,2440 H1.3
PA3: U4.13 U6.1 | length 193.4
  Top Layer w10: U6.1 875,1480 966.73,1388.27 U4.13
PA4: U4.14
PA5: U4.15
PA6: U4.16
PA7: U4.17
PA8: R3.1 U4.29 | length 325.8
  Top Layer w10: U4.29 1150.47,1069.53 1175.47,1044.53 R3.1
PA9: U4.30
PA10: U4.31
PA11: U4.32
PA12: U4.33
PA15: U4.38
PB0: U4.18
PB1: U4.19 U5.1 | length 163.8
  Top Layer w10: U5.1 880.16,1270.16 U4.19
PB3: U4.39
PB4: R4.1 SW1.2 U4.40 | length 1241.9
  Top Layer w10: U4.40 1394.21,1230.79 1465,1160 2295,1160 SW1.2
  Bottom Layer w10: SW1.2 2529.53,1225 R4.1
PB5: R5.1 SW2.2 U4.41 | length 1404.7
  Top Layer w10: U4.41 1345.04,1250 1405,1250 1420,1235 2070,1235 SW2.2
  Bottom Layer w10: SW2.2 2080,1145 2110,1115 2490.51,1115 2600,1224.49 R5.1
PB6: U1.3 U4.42 | length 829.5
  Top Layer w10: U4.42 1344.65,1270.08 1444.92,1270.08 v1(1445,1270)
  Bottom Layer w10: v1(1445,1270) 1670,1045 1670,797.24 U1.3
PB7: U1.4 U4.43 | length 774.2
  Top Layer w10: U4.43 1417.75,1289.84 1422.91,1295 v1(1475,1295)
  Bottom Layer w10: v1(1475,1295) 1710,1060 1710,857.24 U1.4
PB8: R6.1 SW3.2 U4.45 | length 1302.8
  Top Layer w10: U4.45 2109.21,1329.21 SW3.2
  Bottom Layer w10: SW3.2 2404.53,1624.53 R6.1
PB9: H2.2 U4.46 | length 521.9
  Top Layer w10: U4.46 1418.9,1348.9 1700,1630 H2.2
PB10: U4.21
PB11: U4.22
PB12: U3.1 U4.25 | length 279.8
  Top Layer w10: U3.1 1025,1020 1071.73,1066.73 U4.25
PB13: H3.3 U4.26 | length 654.3
  Top Layer w10: H3.3 1070,1025 1091.42,1046.42 U4.26
PB14: H3.2 U4.27 | length 679
  Top Layer w10: U4.27 1111.1,1011.1 1100,1000 1100,540 H3.2
PB15: R2.1 U4.28 | length 433.3
  Top Layer w10: U4.28 1130.79,1105.51 1130.28,1105 1130,1105 1130,739.49 1169.49,700 R2.1
PC13: U4.2
PC14: C10.2 U4.3 Y1.2 | length 413.3
  Top Layer w10: U4.3 1248.9,1490.28 1263.09,1504.46 1263.09,1518.09 v1(1265,1520)
  Bottom Layer w10: Y1.2 1289.21,1554.25 1266.91,1531.95 1266.91,1521.91 v1(1265,1520) 1355,1520 1425,1450 1437.5,1450 1485,1402.5 C10.2
PC15: C12.2 U4.4 Y1.1 | length 628
  Top Layer w10: U4.4 1229.21,1511.51
  Bottom Layer w10: v1(1235,1520) 1233.09,1521.91 1223.13,1521.91 1190.79,1554.25 Y1.1 1190.79,1585.75 1207.44,1602.4 1232.4,1602.4 1265,1635 1380,1635 1455,1560 1510,1560 1557.5,1512.5 1560,1512.5 1580,1492.5 C12.2
PD0: C8.2 R8.2 U4.5 X1.1 | length 581.5
  Top Layer w10: U4.5 1209.53,1624.53 X1.1
  Top Layer w20: X1.1 1412.5,1705 1467.5,1650 C8.2
PD1: C9.2 R8.1 U4.6 X1.2 | length 799.9
  Top Layer w10: X1.2 1189.84,1605.16 U4.6
  Top Layer w20: X1.2 1165,1780 R8.1 1475,1775 C9.2
RESET: R7.1 SW4.2 U4.7 | length 1744.8
  Top Layer w10: v1(1170,1350) 1170.08,1350.08 1170.08,1444.49 U4.7
  Bottom Layer w10: v1(1170,1350) 1190,1330 1830,1330 SW4.2 2220,1720 2535,1720 2595,1660 R7.1
SWDCLK: P1.3 U4.37 | length 291.3
  Top Layer w10: U4.37 1344.57,1015.43 P1.3
SWDIO: P1.2 U4.34 | length 233.2
  Top Layer w10: U4.34 1248.9,1011.1 P1.2
VBAT: U4.1
"voi 1": JP1.1 RL1.3 | length 408
  Bottom Layer w20: JP1.1 2530,2655 RL1.3
"voi 2": JP1.3 RL2.3 | length 534.4
  Bottom Layer w20: RL2.3 2195,2705 2280,2705 2330,2755 JP1.3
pads on no net: H1.4 H1.5 H2.3 H3.4 J1. J1.A5 J1.A6 J1.A7 J1.A8 J1.B5 J1.B6 J1.B7 J1.B8 RL1.2 RL2.2 RL3.2 U1.S1 U1.S2 U1.S3 U1.S4

## Polygon pours and split planes (outlines as drawn)
GND on Layer 1 "GND_L02_P000" (solid, pour order 0): 95,3030 2850,3030 2850,50 120,50 95,75 95,80
GND on Layer 2 "GND_L03_P005" (solid, pour order 5): 105,3035 110,3030 2850,3030 2850,85 2800,35 85,35
3.3V on Layer 2 "3.3V_L03_P003" (solid, pour order 3): 920,1580 935,1565 1420,1565 1420,875 1400,855 1375,880 950,880

## Keep-outs
Keep-Out Layer:
  lines w10: 100,80 100,3025 2845,3025 2845,55 2835,55 1780,55 125,55 100,80

## Silkscreen, mask and mechanical layers (free items; w line width, h text height)
Top Overlay:
  text "PHUN" at 150,2815 h150
  text "SUONG" at 145,2625 h150
  text "Tran Hai" at 160,165 h150

## Text inside footprints (layer, text, board x,y; h text height)
J1: Mechanical 13 "PCB EDGE" at 150.2,420.28 h30 r270